# Altium PCB Bridge_PCB.PcbDoc
Units mm, origin at the board's own origin, x right, y up, seen from the top; angles counter-clockwise.
Board outline 23.2 x 53.3 mm, 2 copper layers (Top Layer, Bottom Layer); 4 components, 4 nets, 50 pads, 4 vias.
Unrouted connection lines stored in the file: 1.
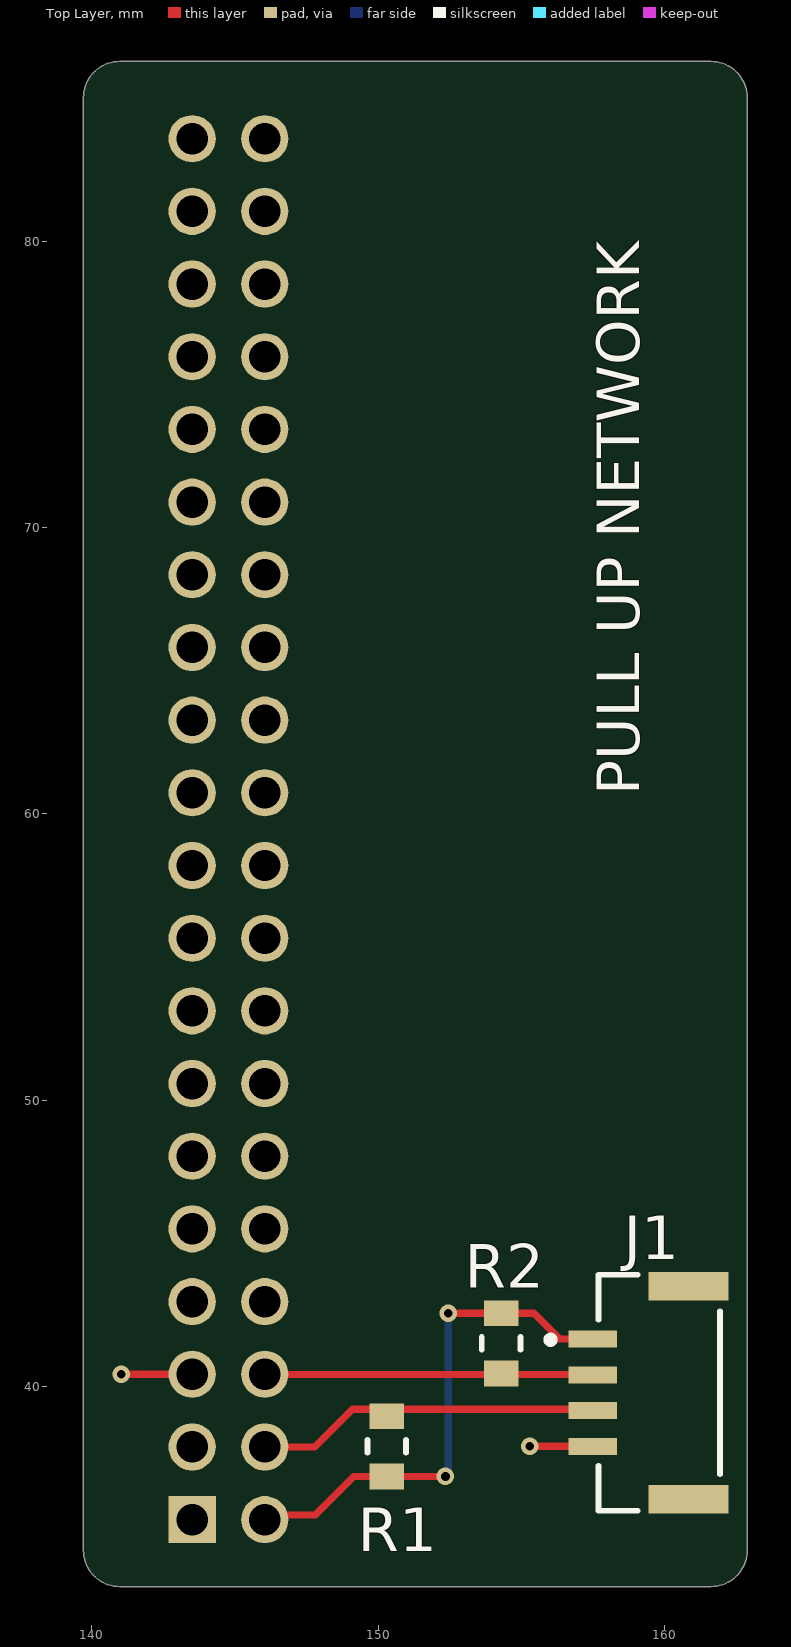
[diagram p0: Top Layer view]
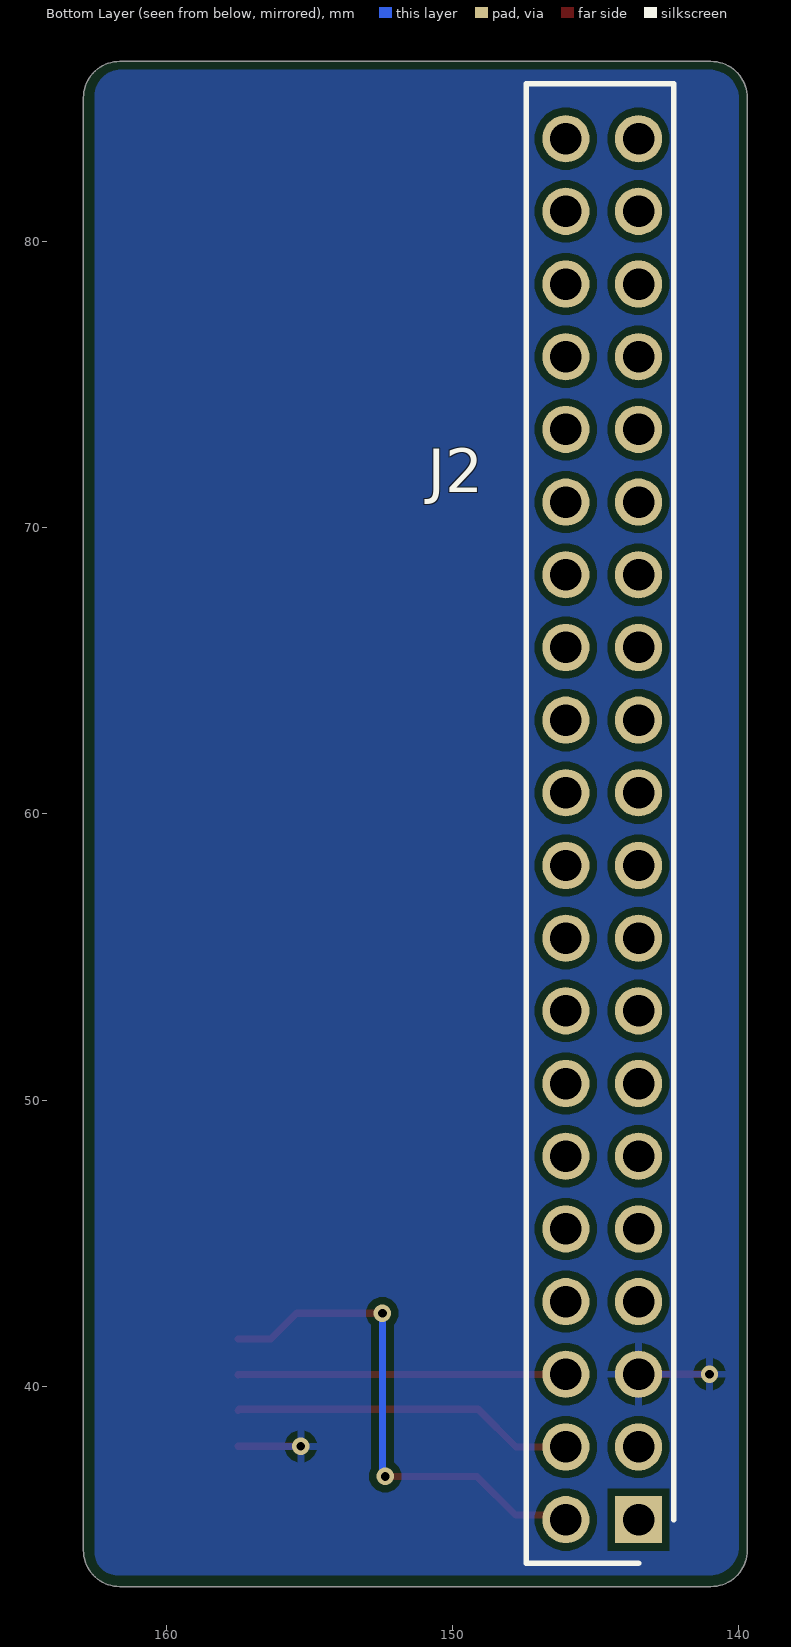
[diagram p1: Bottom Layer view, seen from below]
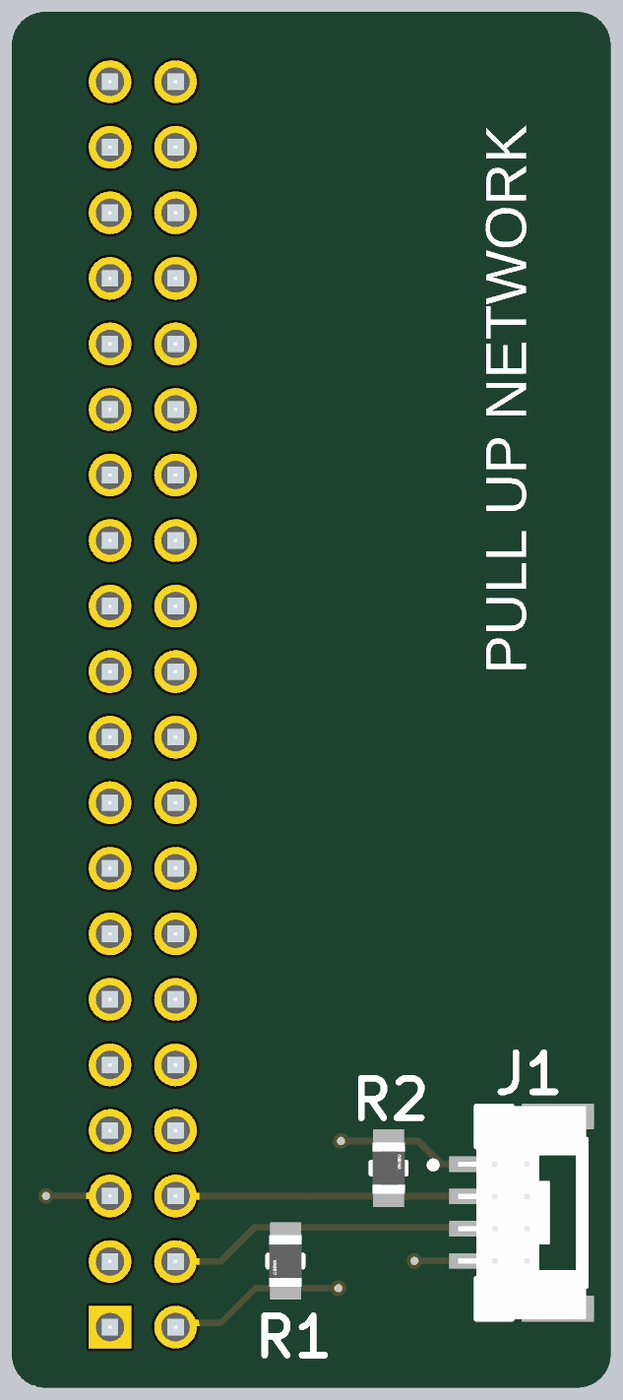
[diagram p2: 3D render of the assembled board from above, using the file's embedded part models]

## Layer stack, top to bottom
Top Solder: solder mask 0.0102, Solder Resist, Dk 3.5
Top Layer: signal copper 0.0356
Dielectric 1: dielectric 0.32, FR-4, Dk 4.8
Bottom Layer: signal copper 0.0356
Bottom Solder: solder mask 0.0102, Solder Resist, Dk 3.5

## Board outline
139.7,34.27 139.7,85.03 cw(c140.97,85.03) 140.97,86.3 161.63,86.3 cw(c161.63,85.03) 162.9,85.03 162.9,34.27 cw(c161.63,34.27) 161.63,33 140.97,33 cw(c140.97,34.27)

## Design rules (kind name [scope] priority, off if disabled: settings)
Clearance [All] p1: gap=0.254 ignorepadtopadclearanceinfootprint=FALSE
PolygonConnect [All] p1: connectstyle=Relief reliefconductorwidth=0.254 reliefentries=4 polygonreliefangle="90 Angle" airgapwidth=0.254
RoutingVias [All] p1: holewidth=0.711 width=1.27 viastyle="Through Hole" minholewidth=0.711 minwidth=1.27 maxholewidth=0.711 maxwidth=1.27
SolderMaskExpansion [All] p1: expansion=0.102 istentingtop=FALSE
SupplyNets "Schematic Supply Nets" [InNet('GND')] p1: voltage=0.000
Width [All] p1: maxlimit=0.254 minlimit=0.254 preferedwidth=0.254
30 further rules are at their usual default settings.

## Components (designator, comment, footprint, x,y, rotation, side; value= is the part's Value field where it differs from the comment)
J1 "BM04B-GHS-TBT(LF)(SN)" FP-BM04B-GHS-TBT_LF_SN-MFG 159.825,39.775 r90 top
J2 "PRT-16764" RHDR40W64P254_2X20_5130X500X1375P 143.5,35.34 r90 bottom
R1 "10k" FP-AT0805-MFG 150.3,37.9 r270 top
R2 "10k" FP-AT0805-MFG 154.3,41.5 r90 top

## Footprints (in the part's own frame and the unit in brackets; to place one, negate y for a bottom-side part, rotate by r counter-clockwise, add the part's x,y. Pads: shape width x height; smd on the part's side, far side on the other; paste and mask are expansions set on the pad)
FP-AT0805-MFG [mm]
  rect 0.9x1.2 smd paste+0 mask+0: 1(-1.05,0) 2(1.05,0)
  silkscreen extent -0.23,-0.67 0.23,0.67, body extent -1.6,-0.77 1.6,0.77, height 0.25
FP-BM04B-GHS-TBT_LF_SN-MFG [mm]
  rect 0.6x1.7 smd paste+0 mask+0: 1(1.875,2.325) 2(0.625,2.325) 3(-0.625,2.325) 4(-1.875,2.325)
  rect 1x2.8 smd paste+0 mask+0: 5(-3.725,-1.025) 6(3.725,-1.025)
  silkscreen extent -4.13,-2.12 4.13,3.92, body extent -4.33,-2.52 4.33,3.27, height 0.25
RHDR40W64P254_2X20_5130X500X1375P [mm]
  rect 1.65x1.65 hole 1.1: 1(0,0)
  round 1.65 hole 1.1: 2(0,2.54) 3(2.54,0) 4(2.54,2.54) 5(5.08,0) 6(5.08,2.54) 7(7.62,0) 8(7.62,2.54) 9(10.16,0) 10(10.16,2.54) 11(12.7,0) 12(12.7,2.54) 13(15.24,0) 14(15.24,2.54) 15(17.78,0) 16(17.78,2.54) 17(20.32,0) 18(20.32,2.54) 19(22.86,0) 20(22.86,2.54) 21(25.4,0) 22(25.4,2.54) 23(27.94,0) 24(27.94,2.54) 25(30.48,0) 26(30.48,2.54) 27(33.02,0) 28(33.02,2.54) 29(35.56,0) 30(35.56,2.54) 31(38.1,0) 32(38.1,2.54) 33(40.64,0) 34(40.64,2.54) 35(43.18,0) 36(43.18,2.54) 37(45.72,0) 38(45.72,2.54) 39(48.26,0) 40(48.26,2.54)
  silkscreen extent -1.52,-1.23 50.18,3.92, body extent -1.52,-1.23 49.78,3.77, height 13.75

## Part data
J1: library part CMP-17439-000062-2, "CONN HEADER SMD 4POS 1.25MM", Case/Package=SMD/SMT, Current Rating=1A, Housing Color=Natural, Max Operating Temperature=85°C, Min Operating Temperature=-25°C, Voltage Rating=50V, Check Connector=Pending, Contact Material=Bronze, Contact Plating=Tin, Gender=Male, Housing Material=Nylon, Lead Free="Lead Free", Number of Contacts=4, Number of Positions=4, Number of Rows=4, Orientation=Straight, Packaging="Cut Tape", Pitch=1.25mm, REACH SVHC="No SVHC", Series=GH, Termination=Crimp, Voltage Rating (AC)=50V, Wire/Cable Gauge=26AWG
J2: "Connector", Manufacturer_Name=SparkFun, Mouser Part Number=474-PRT-16764, Arrow Part Number=PRT-16764, Arrow Price/Stock=null?region=nac, Datasheet Link=https://cdn.sparkfun.com/assets/0/8/d/b/2/DS-16764-2_X_20_Pin_Extended_GPIO_Header_-_Female_-_13.5mm_9.80mm.pdf, Height=13.75mm, Manufacturer_Part_Number=PRT-16764, Mouser Price/Stock=https://www.mouser.co.uk/ProductDetail/SparkFun/PRT-16764?qs=W%2FMpXkg%252BdQ4FKwyaXnhaEw%3D%3D
R1 R2: library part CMP-03412-049031-1, "Thin Film Chip Resistors Automotive Grade 10kΩ 0.5% 50ppm/°C 0805", Case/Package=0805, Max Operating Temperature=155°C, Max Power Dissipation=125mW, Min Operating Temperature=-55°C, Ratings=AEC-Q200, Resistance=10kR, Resistor Type="Thin Film", Temperature Coefficient=50ppm/°C, Tolerance=0.5%, Features="Moisture Resistant", Height=0.024inch, Length=0.079inch, Number of Terminations=2, Packaging="Tape and Reel", RoHS Compliant=Yes, Series=AT, Width=0.049inch

## Via types
v1: diameter 0.61, hole 0.305, Top Layer to Bottom Layer, tented both sides, 4 vias

## Nets (pads, with @x,y where several pads share a name; then routed paths per layer and width w, separated by ;. In a path a pad name is that pad's centre, name@x,y a point inside that pad or via, vN(x,y) a via of type N, cw(c..) or ccw(c..) an arc to the next point about the centre after c; other vN are vias at no path point)
+3V3: J1.1 J2.2 R1.2 R2.2 | length 18.1
  Top Layer w0.254: J2.2 146.2,35.5 147.8,35.5 149.15,36.85 R1.2 v1(152.35,36.85) ; v1(152.45,42.55) R2.2 155.45,42.55 156.35,41.65 J1.1
  Bottom Layer w0.254: v1(152.35,36.85) ccw(c152.35,36.95) 152.45,36.95 v1(152.45,42.55)
GND: J1.4 J2.5 | length 4.7
  Top Layer w0.254: v1@141,40.4 v1(141.02,40.42) J2.5 ; v1(155.3,37.9) J1.4
SCL: J1.2 J2.6 R2.1 | length 11.5
  Top Layer w0.254: J2.6 146.05,40.41 157.49,40.41 J1.2
SDA: J1.3 J2.4 R1.1 | length 12
  Top Layer w0.254: J2.4 147.78,37.88 149.1,39.2 157.45,39.2 J1.3
pads on no net: J1.5 J1.6 J2.1 J2.3 J2.7 J2.8 J2.9 J2.10 J2.11 J2.12 J2.13 J2.14 J2.15 J2.16 J2.17 J2.18 J2.19 J2.20 J2.21 J2.22 J2.23 J2.24 J2.25 J2.26 J2.27 J2.28 J2.29 J2.30 J2.31 J2.32 J2.33 J2.34 J2.35 J2.36 J2.37 J2.38 J2.39 J2.40

## Polygon pours and split planes (outlines as drawn)
GND on Bottom Layer "GND_L02_P000" (solid, pour order 0): 140,85 cw(c141,85) 141,86 161.6,86 cw(c161.6,85.1) 162.5,85.1 162.5,34.2 cw(c161.7,34.2) 161.7,33.4 141,33.4 cw(c141,34.4) 140,34.4

## Silkscreen, mask and mechanical layers (free items; w line width, h text height)
Top Overlay:
  text "PULL UP NETWORK" at 159.618,60.654 h2.54 r90
Mechanical 1:
  lines w0.254: 139.7,34.27 ccw(c140.97,34.27) 140.97,33 145.9,33 161.63,33 ccw(c161.63,34.27) 162.9,34.27 162.9,85.03 ccw(c161.63,85.03) 161.63,86.3 140.97,86.3 ccw(c140.97,85.03) 139.7,85.03 139.7,34.27